# Altium PCB Telemetry_board_pcb.PcbDoc (part 2 of 3)
Units mil, origin at the board's own origin, x right, y up, seen from the top; angles counter-clockwise.
Board outline 3620 x 3014 mil, 2 copper layers (Top Layer, Bottom Layer); 34 components, 32 nets, 214 pads, 35 vias.
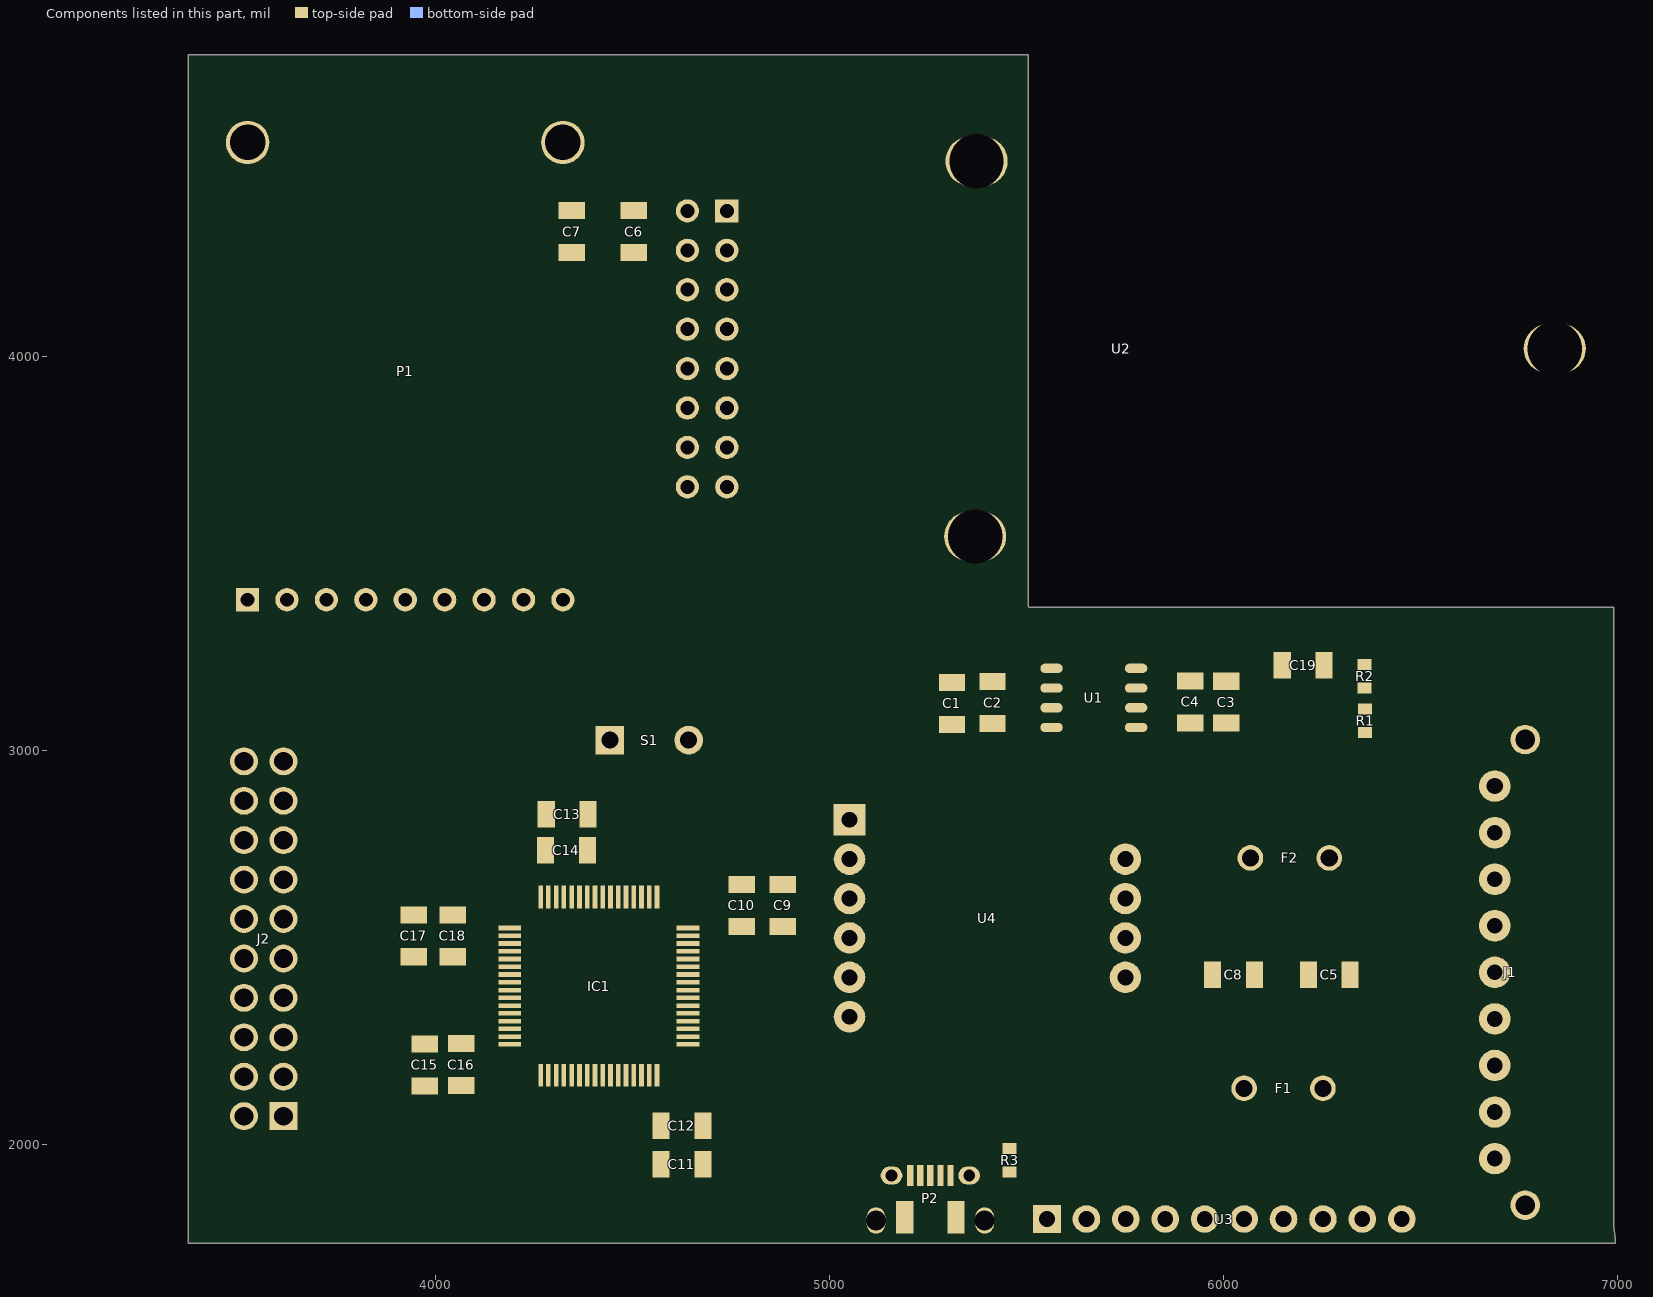
[diagram p2: the components of this part, seen from the top]

## Via types
v1: diameter 20, hole 7.87, Top Layer to Bottom Layer, 21 vias
v2: diameter 20, hole 8, Top Layer to Bottom Layer, 14 vias

## Nets (pads, with @x,y where several pads share a name; then routed paths per layer and width w, separated by ;. In a path a pad name is that pad's centre, name@x,y a point inside that pad or via, vN(x,y) a via of type N, cw(c..) or ccw(c..) an arc to the next point about the centre after c; other vN are vias at no path point) (continued)
copper on no net: (continued)
  Top Layer w1: 4445.84,4500.63 4520.84,4500.63 ; 4445.84,4501.63 4520.84,4501.63 ; 4445.84,4502.63 4520.84,4502.63 ; 4445.84,4503.63 4520.84,4503.63 ; 4445.84,4504.63 4520.84,4504.63 ; 4445.84,4505.63 4520.84,4505.63 ; 4445.84,4506.63 4520.84,4506.63 ; 4445.84,4507.63 4520.84,4507.63 ; 4445.84,4508.63 4520.84,4508.63 ; 4445.84,4509.63 4520.84,4509.63 ; 4445.84,4510.63 4520.84,4510.63 ; 4445.84,4511.63 4520.84,4511.63 ; 4445.84,4512.63 4520.84,4512.63 ; 4445.84,4513.63 4520.84,4513.63 ; 4445.84,4514.63 4520.84,4514.63 ; 4445.84,4515.63 4520.84,4515.63 ; 4445.84,4516.63 4520.84,4516.63 ; 4445.84,4517.63 4520.84,4517.63 ; 4445.84,4518.63 4520.84,4518.63 ; 4445.84,4519.63 4520.84,4519.63 ; 4445.84,4520.63 4520.84,4520.63 ; 4445.84,4521.63 4520.84,4521.63 ; 4445.84,4522.63 4520.84,4522.63 ; 4445.84,4523.63 4520.84,4523.63 ; 4445.84,4524.63 4520.84,4524.63 ; 4445.84,4525.63 4520.84,4525.63 ; 4445.84,4526.63 4520.84,4526.63 ; 4445.84,4527.63 4520.84,4527.63 ; 4445.84,4528.63 4520.84,4528.63 ; 4445.84,4529.63 4520.84,4529.63 ; 4445.84,4530.63 4520.84,4530.63 ; 4445.84,4531.63 4520.84,4531.63 ; 4445.84,4532.63 4520.84,4532.63 ; 4445.84,4533.63 4520.84,4533.63 ; 4445.84,4534.63 4520.84,4534.63 ; 4445.84,4535.63 4520.84,4535.63 ; 4445.84,4536.63 4520.84,4536.63 ; 4445.84,4537.63 4520.84,4537.63 ; 4445.84,4538.63 4520.84,4538.63 ; 4445.84,4539.63 4520.84,4539.63 ; 4445.84,4540.63 4520.84,4540.63 ; 4445.84,4541.63 4520.84,4541.63 ; 4445.84,4542.63 4520.84,4542.63 ; 4445.84,4543.63 4520.84,4543.63 ; 4445.84,4544.63 4520.84,4544.63 ; 4445.84,4545.63 4520.84,4545.63 ; 4445.84,4546.63 4520.84,4546.63 ; 4445.84,4547.63 4520.84,4547.63 ; 4445.84,4548.63 4520.84,4548.63 ; 4445.84,4549.63 4520.84,4549.63 ; 4445.84,4550.63 4520.84,4550.63 ; 4445.84,4551.63 4520.84,4551.63 ; 4445.84,4552.63 4520.84,4552.63 ; 4445.84,4553.63 4520.84,4553.63 ; 4445.84,4554.63 4520.84,4554.63 ; 4445.84,4555.63 4520.84,4555.63 ; 4445.84,4556.63 4520.84,4556.63 ; 4445.84,4578.63 4453.84,4578.63 ; 4445.84,4579.63 4452.84,4579.63 ; 4445.84,4580.63 4451.84,4580.63 ; 4445.84,4581.63 4451.84,4581.63 ; 4445.84,4582.63 4451.84,4582.63 ; 4445.84,4583.63 4451.84,4583.63 ; 4445.84,4584.63 4451.84,4584.63 ; 4445.84,4585.63 4451.84,4585.63 ; 4445.84,4586.63 4451.84,4586.63 ; 4445.84,4587.63 4451.84,4587.63 ; 4445.84,4588.63 4451.84,4588.63 ; 4445.84,4589.63 4451.84,4589.63 ; 4445.84,4590.63 4451.84,4590.63 ; 4445.84,4591.63 4451.84,4591.63 ; 4445.84,4592.63 4451.84,4592.63 ; 4445.84,4593.63 4451.84,4593.63 ; 4445.84,4594.63 4451.84,4594.63 ; 4445.84,4595.63 4451.84,4595.63 ; 4445.84,4596.63 4451.84,4596.63 ; 4445.84,4597.63 4451.84,4597.63 ; 4445.84,4598.63 4451.84,4598.63 ; 4445.84,4599.63 4451.84,4599.63 ; 4445.84,4600.63 4451.84,4600.63 ; 4445.84,4601.63 4451.84,4601.63 ; 4445.84,4602.63 4451.84,4602.63 ; 4445.84,4603.63 4451.84,4603.63 ; 4445.84,4604.63 4451.84,4604.63 ; 4445.84,4605.63 4451.84,4605.63 ; 4445.84,4606.63 4451.84,4606.63 ; 4445.84,4607.63 4451.84,4607.63 ; 4445.84,4608.63 4451.84,4608.63 ; 4445.84,4609.63 4451.84,4609.63 ; 4445.84,4610.63 4451.84,4610.63 ; 4445.84,4611.63 4451.84,4611.63 ; 4445.84,4612.63 4451.84,4612.63 ; 4445.84,4613.63 4451.84,4613.63 ; 4445.84,4614.63 4451.84,4614.63 ; 4445.84,4615.63 4451.84,4615.63 ; 4445.84,4616.63 4451.84,4616.63 ; 4445.84,4617.63 4451.84,4617.63 ; 4445.84,4618.63 4451.84,4618.63 ; 4445.84,4619.63 4451.84,4619.63 ; 4445.84,4620.63 4451.84,4620.63 ; 4445.84,4621.63 4451.84,4621.63 ; 4445.84,4622.63 4451.84,4622.63 ; 4445.84,4623.63 4451.84,4623.63 ; 4445.84,4624.63 4451.84,4624.63 ; 4445.84,4625.63 4451.84,4625.63 ; 4445.84,4626.63 4451.84,4626.63 ; 4445.84,4627.63 4451.84,4627.63 ; 4445.84,4628.63 4451.84,4628.63 ; 4445.84,4629.63 4451.84,4629.63 ; 4445.84,4630.63 4451.84,4630.63 ; 4445.84,4631.63 4451.84,4631.63 ; 4445.84,4632.63 4451.84,4632.63 ; 4445.84,4633.63 4452.84,4633.63 ; 4445.84,4634.63 4453.84,4634.63 ; 4445.84,4656.63 4453.84,4656.63 ; 4445.84,4657.63 4452.84,4657.63 ; 4445.84,4658.63 4451.84,4658.63 ; 4445.84,4659.63 4451.84,4659.63 ; 4445.84,4660.63 4451.84,4660.63 ; 4445.84,4661.63 4451.84,4661.63 ; 4445.84,4662.63 4451.84,4662.63 ; 4445.84,4663.63 4451.84,4663.63 ; 4445.84,4664.63 4451.84,4664.63 ; 4445.84,4665.63 4451.84,4665.63 ; 4445.84,4666.63 4451.84,4666.63 ; 4445.84,4667.63 4451.84,4667.63 ; 4445.84,4668.63 4451.84,4668.63 ; 4445.84,4669.63 4451.84,4669.63 ; 4445.84,4670.63 4451.84,4670.63 ; 4445.84,4671.63 4451.84,4671.63 ; 4445.84,4672.63 4451.84,4672.63 ; 4445.84,4673.63 4451.84,4673.63 ; 4445.84,4674.63 4451.84,4674.63 ; 4445.84,4675.63 4451.84,4675.63 ; 4445.84,4676.63 4451.84,4676.63 ; 4445.84,4677.63 4451.84,4677.63 ; 4445.84,4678.63 4451.84,4678.63 ; 4445.84,4679.63 4451.84,4679.63 ; 4445.84,4680.63 4451.84,4680.63 ; 4445.84,4681.63 4451.84,4681.63 ; 4445.84,4682.63 4451.84,4682.63 ; 4445.84,4683.63 4451.84,4683.63 ; 4445.84,4684.63 4451.84,4684.63 ; 4445.84,4685.63 4451.84,4685.63 ; 4445.84,4686.63 4451.84,4686.63 ; 4445.84,4687.63 4451.84,4687.63 ; 4445.84,4688.63 4451.84,4688.63 ; 4445.84,4689.63 4451.84,4689.63 ; 4445.84,4690.63 4451.84,4690.63 ; 4445.84,4691.63 4451.84,4691.63 ; 4445.84,4692.63 4451.84,4692.63 ; 4445.84,4693.63 4451.84,4693.63 ; 4445.84,4694.63 4451.84,4694.63 ; 4445.84,4695.63 4451.84,4695.63 ; 4445.84,4696.63 4451.84,4696.63 ; 4445.84,4697.63 4451.84,4697.63 ; 4445.84,4698.63 4451.84,4698.63 ; 4445.84,4699.63 4451.84,4699.63 ; 4445.84,4700.63 4451.84,4700.63 ; 4445.84,4701.63 4451.84,4701.63 ; 4445.84,4702.63 4451.84,4702.63 ; 4445.84,4703.63 4451.84,4703.63 ; 4445.84,4704.63 4451.84,4704.63 ; 4445.84,4705.63 4451.84,4705.63 ; 4445.84,4706.63 4451.84,4706.63 ; 4445.84,4707.63 4451.84,4707.63 ; 4445.84,4708.63 4451.84,4708.63 ; 4445.84,4709.63 4451.84,4709.63 ; 4445.84,4710.63 4451.84,4710.63 ; 4445.84,4711.63 4452.84,4711.63 ; 4445.84,4712.63 4453.84,4712.63 ; 4446.84,4499.63 4519.84,4499.63 ; 4446.84,4557.63 4519.84,4557.63 ; 4446.84,4559.63 4447.84,4559.63 ; 4446.84,4577.63 4454.84,4577.63 ; 4446.84,4635.63 4454.84,4635.63 ; 4446.84,4637.63 4447.84,4637.63 ; 4446.84,4655.63 4454.84,4655.63 ; 4446.84,4713.63 4454.84,4713.63 ; 4446.84,4715.63 4447.84,4715.63 ; 4447.84,4498.63 4518.84,4498.63 ; 4447.84,4558.63 4518.84,4558.63 ; 4447.84,4576.63 4455.84,4576.63 ; 4447.84,4636.63 4455.84,4636.63 ; 4447.84,4638.63 4448.84,4638.63 ; 4447.84,4654.63 4455.84,4654.63 ; 4447.84,4714.63 4455.84,4714.63 ; 4447.84,4716.63 4448.84,4716.63 ; 4448.84,4497.63 4517.84,4497.63 ; 4448.84,4559.63 4517.84,4559.63 ; 4448.84,4561.63 4449.84,4561.63 ; 4448.84,4575.63 4517.84,4575.63 ; 4448.84,4637.63 4517.84,4637.63 ; 4448.84,4639.63 4449.84,4639.63 ; 4448.84,4653.63 4456.84,4653.63 ; 4448.84,4715.63 4517.84,4715.63 ; 4449.84,4496.63 4516.84,4496.63 ; 4449.84,4560.63 4516.84,4560.63 ; 4449.84,4562.63 4450.84,4562.63 ; 4449.84,4574.63 4516.84,4574.63 ; 4449.84,4638.63 4516.84,4638.63 ; 4449.84,4640.63 4450.84,4640.63 ; 4449.84,4652.63 4516.84,4652.63 ; 4449.84,4716.63 4516.84,4716.63 ; 4449.84,4718.63 4450.84,4718.63 ; 4450.84,4495.63 4515.84,4495.63 ; 4450.84,4561.63 4515.84,4561.63 ; 4450.84,4563.63 4451.84,4563.63 ; 4450.84,4573.63 4515.84,4573.63 ; 4450.84,4639.63 4515.84,4639.63 ; 4450.84,4651.63 4515.84,4651.63 ; 4450.84,4717.63 4515.84,4717.63 ; 4450.84,4719.63 4451.84,4719.63 ; 4451.84,4494.63 4514.84,4494.63 ; 4451.84,4562.63 4514.84,4562.63 ; 4451.84,4572.63 4514.84,4572.63 ; 4451.84,4640.63 4514.84,4640.63 ; 4451.84,4650.63 4514.84,4650.63 ; 4451.84,4718.63 4514.84,4718.63 ; 4452.84,4493.63 4513.84,4493.63 ; 4452.84,4563.63 4513.84,4563.63 ; 4452.84,4571.63 4513.84,4571.63 ; 4452.84,4641.63 4513.84,4641.63 ; 4452.84,4649.63 4513.84,4649.63 ; 4452.84,4719.63 4513.84,4719.63 ; 4453.84,4492.63 4512.84,4492.63 ; 4453.84,4564.63 4512.84,4564.63 ; 4453.84,4570.63 4512.84,4570.63 ; 4453.84,4642.63 4512.84,4642.63 ; 4453.84,4648.63 4512.84,4648.63 ; 4453.84,4720.63 4512.84,4720.63 ; 4508.84,4653.63 4517.84,4653.63 ; 4510.84,4576.63 4518.84,4576.63 ; 4510.84,4636.63 4518.84,4636.63 ; 4510.84,4654.63 4518.84,4654.63 ; 4510.84,4714.63 4518.84,4714.63 ; 4511.84,4577.63 4519.84,4577.63 ; 4511.84,4635.63 4519.84,4635.63 ; 4511.84,4655.63 4519.84,4655.63 ; 4511.84,4713.63 4519.84,4713.63 ; 4512.84,4578.63 4520.84,4578.63 ; 4512.84,4634.63 4520.84,4634.63 ; 4512.84,4656.63 4520.84,4656.63 ; 4512.84,4712.63 4520.84,4712.63 ; 4513.84,4579.63 4520.84,4579.63 ; 4513.84,4633.63 4520.84,4633.63 ; 4513.84,4657.63 4520.84,4657.63 ; 4513.84,4711.63 4520.84,4711.63 ; 4514.84,4563.63 4515.84,4563.63 ; 4514.84,4580.63 4520.84,4580.63 ; 4514.84,4581.63 4520.84,4581.63 ; 4514.84,4582.63 4520.84,4582.63 ; 4514.84,4583.63 4520.84,4583.63 ; 4514.84,4584.63 4520.84,4584.63 ; 4514.84,4585.63 4520.84,4585.63 ; 4514.84,4586.63 4520.84,4586.63 ; 4514.84,4587.63 4520.84,4587.63 ; 4514.84,4588.63 4520.84,4588.63 ; 4514.84,4589.63 4520.84,4589.63 ; 4514.84,4590.63 4520.84,4590.63 ; 4514.84,4592.63 4520.84,4592.63 ; 4514.84,4593.63 4520.84,4593.63 ; 4514.84,4594.63 4520.84,4594.63 ; 4514.84,4595.63 4520.84,4595.63 ; 4514.84,4596.63 4520.84,4596.63 ; 4514.84,4597.63 4520.84,4597.63 ; 4514.84,4598.63 4520.84,4598.63 ; 4514.84,4599.63 4520.84,4599.63 ; 4514.84,4600.63 4520.84,4600.63 ; 4514.84,4601.63 4520.84,4601.63 ; 4514.84,4602.63 4520.84,4602.63 ; 4514.84,4603.63 4520.84,4603.63 ; 4514.84,4604.63 4520.84,4604.63 ; 4514.84,4605.63 4520.84,4605.63 ; 4514.84,4606.63 4520.84,4606.63 ; 4514.84,4607.63 4520.84,4607.63 ; 4514.84,4608.63 4520.84,4608.63 ; 4514.84,4609.63 4520.84,4609.63 ; 4514.84,4610.63 4520.84,4610.63 ; 4514.84,4611.63 4520.84,4611.63 ; 4514.84,4612.63 4520.84,4612.63 ; 4514.84,4613.63 4520.84,4613.63 ; 4514.84,4614.63 4520.84,4614.63 ; 4514.84,4615.63 4520.84,4615.63 ; 4514.84,4616.63 4520.84,4616.63 ; 4514.84,4617.63 4520.84,4617.63 ; 4514.84,4618.63 4520.84,4618.63 ; 4514.84,4619.63 4520.84,4619.63 ; 4514.84,4620.63 4520.84,4620.63 ; 4514.84,4621.63 4520.84,4621.63 ; 4514.84,4622.63 4520.84,4622.63 ; 4514.84,4623.63 4520.84,4623.63 ; 4514.84,4624.63 4520.84,4624.63 ; 4514.84,4625.63 4520.84,4625.63 ; 4514.84,4626.63 4520.84,4626.63 ; 4514.84,4627.63 4520.84,4627.63 ; 4514.84,4628.63 4520.84,4628.63 ; 4514.84,4629.63 4520.84,4629.63 ; 4514.84,4630.63 4520.84,4630.63 ; 4514.84,4631.63 4520.84,4631.63 ; 4514.84,4632.63 4520.84,4632.63 ; 4514.84,4641.63 4515.84,4641.63 ; 4514.84,4658.63 4520.84,4658.63 ; 4514.84,4659.63 4520.84,4659.63 ; 4514.84,4660.63 4520.84,4660.63 ; 4514.84,4661.63 4520.84,4661.63 ; 4514.84,4662.63 4520.84,4662.63 ; 4514.84,4663.63 4520.84,4663.63 ; 4514.84,4664.63 4520.84,4664.63 ; 4514.84,4665.63 4520.84,4665.63 ; 4514.84,4666.63 4520.84,4666.63 ; 4514.84,4667.63 4520.84,4667.63 ; 4514.84,4668.63 4520.84,4668.63 ; 4514.84,4669.63 4520.84,4669.63 ; 4514.84,4670.63 4520.84,4670.63 ; 4514.84,4671.63 4520.84,4671.63 ; 4514.84,4672.63 4520.84,4672.63 ; 4514.84,4673.63 4520.84,4673.63 ; 4514.84,4674.63 4520.84,4674.63 ; 4514.84,4675.63 4520.84,4675.63 ; 4514.84,4676.63 4520.84,4676.63 ; 4514.84,4677.63 4520.84,4677.63 ; 4514.84,4678.63 4520.84,4678.63 ; 4514.84,4679.63 4520.84,4679.63 ; 4514.84,4680.63 4520.84,4680.63 ; 4514.84,4681.63 4520.84,4681.63 ; 4514.84,4682.63 4520.84,4682.63 ; 4514.84,4683.63 4520.84,4683.63 ; 4514.84,4684.63 4520.84,4684.63 ; 4514.84,4685.63 4520.84,4685.63 ; 4514.84,4686.63 4520.84,4686.63 ; 4514.84,4687.63 4520.84,4687.63 ; 4514.84,4688.63 4520.84,4688.63 ; 4514.84,4689.63 4520.84,4689.63 ; 4514.84,4690.63 4520.84,4690.63 ; 4514.84,4691.63 4520.84,4691.63 ; 4514.84,4692.63 4520.84,4692.63 ; 4514.84,4693.63 4520.84,4693.63 ; 4514.84,4694.63 4520.84,4694.63 ; 4514.84,4695.63 4520.84,4695.63 ; 4514.84,4696.63 4520.84,4696.63 ; 4514.84,4697.63 4520.84,4697.63 ; 4514.84,4698.63 4520.84,4698.63 ; 4514.84,4699.63 4520.84,4699.63 ; 4514.84,4700.63 4520.84,4700.63 ; 4514.84,4701.63 4520.84,4701.63 ; 4514.84,4702.63 4520.84,4702.63 ; 4514.84,4703.63 4520.84,4703.63 ; 4514.84,4704.63 4520.84,4704.63 ; 4514.84,4705.63 4520.84,4705.63 ; 4514.84,4706.63 4520.84,4706.63 ; 4514.84,4707.63 4520.84,4707.63 ; 4514.84,4708.63 4520.84,4708.63 ; 4514.84,4709.63 4520.84,4709.63 ; 4514.84,4710.63 4520.84,4710.63 ; 4514.84,4719.63 4515.84,4719.63 ; 4515.84,4562.63 4516.84,4562.63 ; 4515.84,4591.63 4520.84,4591.63 ; 4515.84,4640.63 4516.84,4640.63 ; 4515.84,4718.63 4516.84,4718.63 ; 4516.84,4561.63 4517.84,4561.63 ; 4516.84,4639.63 4517.84,4639.63 ; 4516.84,4717.63 4517.84,4717.63 ; 4517.84,4560.63 4518.84,4560.63 ; 4517.84,4638.63 4518.84,4638.63 ; 4517.84,4716.63 4518.84,4716.63 ; 4518.84,4559.63 4519.84,4559.63 ; 4518.84,4637.63 4519.84,4637.63 ; 4518.84,4715.63 4519.84,4715.63 ; 4526.84,4500.63 4601.84,4500.63 ; 4526.84,4501.63 4601.84,4501.63 ; 4526.84,4502.63 4601.84,4502.63 ; 4526.84,4503.63 4601.84,4503.63 ; 4526.84,4504.63 4601.84,4504.63 ; 4526.84,4505.63 4601.84,4505.63 ; 4526.84,4506.63 4601.84,4506.63 ; 4526.84,4507.63 4601.84,4507.63 ; 4526.84,4508.63 4601.84,4508.63 ; 4526.84,4509.63 4601.84,4509.63 ; 4526.84,4510.63 4601.84,4510.63 ; 4526.84,4511.63 4601.84,4511.63 ; 4526.84,4512.63 4601.84,4512.63 ; 4526.84,4513.63 4601.84,4513.63 ; 4526.84,4514.63 4601.84,4514.63 ; 4526.84,4515.63 4601.84,4515.63 ; 4526.84,4516.63 4601.84,4516.63 ; 4526.84,4517.63 4601.84,4517.63 ; 4526.84,4518.63 4601.84,4518.63 ; 4526.84,4519.63 4601.84,4519.63 ; 4526.84,4520.63 4601.84,4520.63 ; 4526.84,4521.63 4601.84,4521.63 ; 4526.84,4522.63 4601.84,4522.63 ; 4526.84,4523.63 4601.84,4523.63 ; 4526.84,4524.63 4601.84,4524.63 ; 4526.84,4525.63 4601.84,4525.63 ; 4526.84,4526.63 4601.84,4526.63 ; 4526.84,4527.63 4601.84,4527.63 ; 4526.84,4528.63 4601.84,4528.63 ; 4526.84,4529.63 4601.84,4529.63 ; 4526.84,4530.63 4601.84,4530.63 ; 4526.84,4531.63 4601.84,4531.63 ; 4526.84,4532.63 4601.84,4532.63 ; 4526.84,4533.63 4601.84,4533.63 ; 4526.84,4534.63 4601.84,4534.63 ; 4526.84,4535.63 4601.84,4535.63 ; 4526.84,4536.63 4601.84,4536.63 ; 4526.84,4537.63 4601.84,4537.63 ; 4526.84,4538.63 4601.84,4538.63 ; 4526.84,4539.63 4601.84,4539.63 ; 4526.84,4540.63 4601.84,4540.63 ; 4526.84,4541.63 4601.84,4541.63 ; 4526.84,4542.63 4601.84,4542.63 ; 4526.84,4543.63 4601.84,4543.63 ; 4526.84,4544.63 4601.84,4544.63 ; 4526.84,4545.63 4601.84,4545.63 ; 4526.84,4546.63 4601.84,4546.63 ; 4526.84,4547.63 4601.84,4547.63 ; 4526.84,4548.63 4601.84,4548.63 ; 4526.84,4549.63 4601.84,4549.63 ; 4526.84,4550.63 4601.84,4550.63 ; 4526.84,4551.63 4601.84,4551.63 ; 4526.84,4552.63 4601.84,4552.63 ; 4526.84,4553.63 4601.84,4553.63 ; 4526.84,4554.63 4601.84,4554.63 ; 4526.84,4555.63 4601.84,4555.63 ; 4526.84,4656.63 4534.84,4656.63 ; 4526.84,4657.63 4533.84,4657.63 ; 4526.84,4658.63 4532.84,4658.63 ; 4526.84,4659.63 4532.84,4659.63 ; 4526.84,4660.63 4532.84,4660.63 ; 4526.84,4661.63 4532.84,4661.63 ; 4526.84,4662.63 4532.84,4662.63 ; 4526.84,4663.63 4532.84,4663.63 ; 4526.84,4664.63 4532.84,4664.63 ; 4526.84,4665.63 4532.84,4665.63 ; 4526.84,4666.63 4532.84,4666.63 ; 4526.84,4667.63 4532.84,4667.63 ; 4526.84,4668.63 4532.84,4668.63 ; 4526.84,4669.63 4532.84,4669.63 ; 4526.84,4670.63 4532.84,4670.63 ; 4526.84,4671.63 4532.84,4671.63 ; 4526.84,4672.63 4532.84,4672.63 ; 4526.84,4673.63 4532.84,4673.63 ; 4526.84,4674.63 4532.84,4674.63 ; 4526.84,4675.63 4532.84,4675.63 ; 4526.84,4676.63 4532.84,4676.63 ; 4526.84,4677.63 4532.84,4677.63 ; 4526.84,4678.63 4532.84,4678.63 ; 4526.84,4679.63 4532.84,4679.63 ; 4526.84,4680.63 4532.84,4680.63 ; 4526.84,4681.63 4532.84,4681.63 ; 4526.84,4682.63 4532.84,4682.63 ; 4526.84,4683.63 4532.84,4683.63 ; 4526.84,4684.63 4532.84,4684.63 ; 4526.84,4685.63 4532.84,4685.63 ; 4526.84,4686.63 4532.84,4686.63 ; 4526.84,4687.63 4532.84,4687.63 ; 4526.84,4688.63 4532.84,4688.63 ; 4526.84,4689.63 4532.84,4689.63 ; 4526.84,4690.63 4532.84,4690.63 ; 4526.84,4691.63 4532.84,4691.63 ; 4526.84,4692.63 4532.84,4692.63 ; 4526.84,4693.63 4532.84,4693.63 ; 4526.84,4694.63 4532.84,4694.63 ; 4526.84,4695.63 4532.84,4695.63 ; 4526.84,4696.63 4532.84,4696.63 ; 4526.84,4697.63 4532.84,4697.63 ; 4526.84,4698.63 4532.84,4698.63 ; 4526.84,4699.63 4532.84,4699.63 ; 4526.84,4700.63 4532.84,4700.63 ; 4526.84,4701.63 4532.84,4701.63 ; 4526.84,4702.63 4532.84,4702.63 ; 4526.84,4703.63 4532.84,4703.63 ; 4526.84,4704.63 4532.84,4704.63 ; 4526.84,4705.63 4532.84,4705.63 ; 4526.84,4706.63 4532.84,4706.63 ; 4526.84,4707.63 4532.84,4707.63 ; 4526.84,4708.63 4532.84,4708.63 ; 4526.84,4709.63 4532.84,4709.63 ; 4526.84,4710.63 4532.84,4710.63 ; 4526.84,4711.63 4533.84,4711.63 ; 4527.84,4497.63 4528.84,4497.63 ; 4527.84,4499.63 4601.84,4499.63 ; 4527.84,4556.63 4601.84,4556.63 ; 4527.84,4557.63 4600.84,4557.63 ; 4527.84,4559.63 4528.84,4559.63 ; 4527.84,4577.63 4533.84,4577.63 ; 4527.84,4578.63 4534.84,4578.63 ; 4527.84,4579.63 4535.84,4579.63 ; 4527.84,4580.63 4536.84,4580.63 ; 4527.84,4581.63 4537.84,4581.63 ; 4527.84,4582.63 4538.84,4582.63 ; 4527.84,4583.63 4539.84,4583.63 ; 4527.84,4584.63 4540.84,4584.63 ; 4527.84,4585.63 4541.84,4585.63 ; 4527.84,4586.63 4533.84,4586.63 ; 4527.84,4587.63 4533.84,4587.63 ; 4527.84,4588.63 4533.84,4588.63 ; 4527.84,4589.63 4533.84,4589.63 ; 4527.84,4590.63 4533.84,4590.63 ; 4527.84,4591.63 4533.84,4591.63 ; 4527.84,4592.63 4533.84,4592.63 ; 4527.84,4593.63 4533.84,4593.63 ; 4527.84,4594.63 4533.84,4594.63 ; 4527.84,4595.63 4533.84,4595.63 ; 4527.84,4596.63 4533.84,4596.63 ; 4527.84,4597.63 4533.84,4597.63 ; 4527.84,4598.63 4533.84,4598.63 ; 4527.84,4599.63 4533.84,4599.63 ; 4527.84,4600.63 4533.84,4600.63 ; 4527.84,4601.63 4533.84,4601.63 ; 4527.84,4602.63 4533.84,4602.63 ; 4527.84,4603.63 4533.84,4603.63 ; 4527.84,4604.63 4533.84,4604.63 ; 4527.84,4605.63 4533.84,4605.63 ; 4527.84,4606.63 4533.84,4606.63 ; 4527.84,4607.63 4533.84,4607.63 ; 4527.84,4608.63 4533.84,4608.63 ; 4527.84,4609.63 4533.84,4609.63 ; 4527.84,4610.63 4533.84,4610.63 ; 4527.84,4611.63 4533.84,4611.63 ; 4527.84,4612.63 4533.84,4612.63 ; 4527.84,4613.63 4533.84,4613.63 ; 4527.84,4614.63 4533.84,4614.63 ; 4527.84,4615.63 4533.84,4615.63 ; 4527.84,4616.63 4533.84,4616.63 ; 4527.84,4617.63 4533.84,4617.63 ; 4527.84,4618.63 4533.84,4618.63 ; 4527.84,4619.63 4533.84,4619.63 ; 4527.84,4620.63 4533.84,4620.63 ; 4527.84,4621.63 4533.84,4621.63 ; 4527.84,4622.63 4533.84,4622.63 ; 4527.84,4623.63 4533.84,4623.63 ; 4527.84,4624.63 4533.84,4624.63 ; 4527.84,4625.63 4533.84,4625.63 ; 4527.84,4626.63 4533.84,4626.63 ; 4527.84,4627.63 4533.84,4627.63 ; 4527.84,4628.63 4533.84,4628.63 ; 4527.84,4629.63 4533.84,4629.63 ; 4527.84,4630.63 4533.84,4630.63 ; 4527.84,4631.63 4533.84,4631.63 ; 4527.84,4632.63 4533.84,4632.63 ; 4527.84,4633.63 4534.84,4633.63 ; 4527.84,4634.63 4535.84,4634.63 ; 4527.84,4653.63 4528.84,4653.63 ; 4527.84,4655.63 4535.84,4655.63 ; 4527.84,4712.63 4534.84,4712.63 ; 4527.84,4713.63 4535.84,4713.63 ; 4527.84,4715.63 4528.84,4715.63 ; 4528.84,4498.63 4600.84,4498.63 ; 4528.84,4558.63 4599.84,4558.63 ; 4528.84,4576.63 4532.84,4576.63 ; 4528.84,4635.63 4536.84,4635.63 ; 4528.84,4652.63 4529.84,4652.63 ; 4528.84,4654.63 4536.84,4654.63 ; 4528.84,4714.63 4536.84,4714.63 ; 4528.84,4716.63 4529.84,4716.63 ; 4529.84,4495.63 4530.84,4495.63 ; 4529.84,4497.63 4599.84,4497.63 ; 4529.84,4559.63 4598.84,4559.63 ; 4529.84,4561.63 4530.84,4561.63 ; 4529.84,4575.63 4531.84,4575.63 ; 4529.84,4636.63 4537.84,4636.63 ; 4529.84,4653.63 4537.84,4653.63 ; 4529.84,4715.63 4598.84,4715.63 ; 4529.84,4717.63 4530.84,4717.63 ; 4530.84,4496.63 4598.84,4496.63 ; 4530.84,4560.63 4597.84,4560.63 ; 4530.84,4562.63 4531.84,4562.63 ; 4530.84,4637.63 4593.84,4637.63 ; 4530.84,4650.63 4531.84,4650.63 ; 4530.84,4652.63 4598.84,4652.63 ; 4530.84,4716.63 4597.84,4716.63 ; 4530.84,4718.63 4531.84,4718.63 ; 4531.84,4493.63 4532.84,4493.63 ; 4531.84,4495.63 4597.84,4495.63 ; 4531.84,4561.63 4596.84,4561.63 ; 4531.84,4563.63 4532.84,4563.63 ; 4531.84,4638.63 4594.84,4638.63 ; 4531.84,4651.63 4597.84,4651.63 ; 4531.84,4717.63 4596.84,4717.63 ; 4531.84,4719.63 4532.84,4719.63 ; 4532.84,4494.63 4596.84,4494.63 ; 4532.84,4562.63 4595.84,4562.63 ; 4532.84,4570.63 4533.84,4570.63 ; 4532.84,4572.63 4596.84,4572.63 ; 4532.84,4573.63 4597.84,4573.63 ; 4532.84,4639.63 4595.84,4639.63 ; 4532.84,4650.63 4596.84,4650.63 ; 4532.84,4718.63 4595.84,4718.63 ; 4533.84,4493.63 4595.84,4493.63 ; 4533.84,4563.63 4594.84,4563.63 ; 4533.84,4571.63 4595.84,4571.63 ; 4533.84,4574.63 4598.84,4574.63 ; 4533.84,4640.63 4595.84,4640.63 ; 4533.84,4649.63 4594.84,4649.63 ; 4533.84,4719.63 4594.84,4719.63 ; 4534.84,4492.63 4594.84,4492.63 ; 4534.84,4564.63 4593.84,4564.63 ; 4534.84,4570.63 4594.84,4570.63 ; 4534.84,4575.63 4599.84,4575.63 ; 4534.84,4586.63 4542.84,4586.63 ; 4534.84,4641.63 4594.84,4641.63 ; 4534.84,4648.63 4594.84,4648.63 ; 4534.84,4720.63 4593.84,4720.63 ; 4535.84,4576.63 4600.84,4576.63 ; 4535.84,4587.63 4543.84,4587.63 ; 4535.84,4642.63 4593.84,4642.63 ; 4536.84,4577.63 4601.84,4577.63 ; 4536.84,4588.63 4544.84,4588.63 ; 4537.84,4578.63 4601.84,4578.63 ; 4537.84,4589.63 4545.84,4589.63 ; 4538.84,4579.63 4602.84,4579.63 ; 4538.84,4590.63 4546.84,4590.63 ; 4539.84,4580.63 4602.84,4580.63 ; 4539.84,4591.63 4547.84,4591.63 ; 4540.84,4581.63 4602.84,4581.63 ; 4540.84,4592.63 4548.84,4592.63 ; 4541.84,4582.63 4602.84,4582.63 ; 4541.84,4593.63 4549.84,4593.63 ; 4542.84,4583.63 4602.84,4583.63 ; 4542.84,4594.63 4550.84,4594.63 ; 4543.84,4584.63 4602.84,4584.63 ; 4543.84,4595.63 4551.84,4595.63 ; 4544.84,4585.63 4602.84,4585.63 ; 4544.84,4596.63 4552.84,4596.63 ; 4545.84,4586.63 4602.84,4586.63 ; 4545.84,4597.63 4553.84,4597.63 ; 4546.84,4587.63 4602.84,4587.63 ; 4546.84,4598.63 4554.84,4598.63 ; 4547.84,4588.63 4602.84,4588.63 ; 4547.84,4599.63 4555.84,4599.63 ; 4548.84,4589.63 4602.84,4589.63 ; 4548.84,4600.63 4556.84,4600.63 ; 4549.84,4590.63 4602.84,4590.63 ; 4549.84,4601.63 4557.84,4601.63 ; 4550.84,4591.63 4602.84,4591.63 ; 4550.84,4602.63 4558.84,4602.63 ; 4551.84,4592.63 4602.84,4592.63 ; 4551.84,4594.63 4552.84,4594.63 ; 4551.84,4603.63 4559.84,4603.63 ; 4552.84,4593.63 4602.84,4593.63 ; 4552.84,4595.63 4553.84,4595.63 ; 4552.84,4604.63 4560.84,4604.63 ; 4553.84,4594.63 4602.84,4594.63 ; 4553.84,4596.63 4554.84,4596.63 ; 4553.84,4605.63 4561.84,4605.63 ; 4554.84,4595.63 4602.84,4595.63 ; 4554.84,4597.63 4555.84,4597.63 ; 4554.84,4606.63 4562.84,4606.63 ; 4555.84,4596.63 4602.84,4596.63 ; 4555.84,4598.63 4556.84,4598.63 ; 4555.84,4607.63 4563.84,4607.63 ; 4556.84,4597.63 4602.84,4597.63 ; 4556.84,4599.63 4557.84,4599.63 ; 4556.84,4608.63 4564.84,4608.63 ; 4557.84,4598.63 4602.84,4598.63 ; 4557.84,4600.63 4558.84,4600.63 ; 4557.84,4609.63 4565.84,4609.63 ; 4558.84,4599.63 4602.84,4599.63 ; 4558.84,4601.63 4559.84,4601.63 ; 4558.84,4610.63 4566.84,4610.63 ; 4559.84,4600.63 4602.84,4600.63 ; 4559.84,4602.63 4560.84,4602.63 ; 4559.84,4611.63 4567.84,4611.63 ; 4560.84,4601.63 4602.84,4601.63 ; 4560.84,4603.63 4561.84,4603.63 ; 4560.84,4612.63 4568.84,4612.63 ; 4561.84,4602.63 4602.84,4602.63 ; 4561.84,4604.63 4562.84,4604.63 ; 4561.84,4613.63 4569.84,4613.63 ; 4561.84,4653.63 4562.84,4653.63 ; 4562.84,4603.63 4602.84,4603.63 ; 4562.84,4605.63 4563.84,4605.63 ; 4562.84,4614.63 4570.84,4614.63 ; 4563.84,4604.63 4602.84,4604.63 ; 4563.84,4606.63 4564.84,4606.63 ; 4563.84,4615.63 4571.84,4615.63 ; 4564.84,4605.63 4602.84,4605.63 ; 4564.84,4607.63 4565.84,4607.63 ; 4564.84,4616.63 4572.84,4616.63 ; 4565.84,4606.63 4602.84,4606.63 ; 4565.84,4608.63 4566.84,4608.63 ; 4565.84,4617.63 4573.84,4617.63 ; 4566.84,4607.63 4602.84,4607.63 ; 4566.84,4609.63 4567.84,4609.63 ; 4566.84,4618.63 4574.84,4618.63 ; 4567.84,4608.63 4602.84,4608.63 ; 4567.84,4610.63 4568.84,4610.63 ; 4567.84,4619.63 4575.84,4619.63 ; 4568.84,4609.63 4602.84,4609.63 ; 4568.84,4611.63 4569.84,4611.63 ; 4568.84,4620.63 4576.84,4620.63 ; 4569.84,4610.63 4602.84,4610.63 ; 4569.84,4612.63 4570.84,4612.63 ; 4569.84,4621.63 4577.84,4621.63 ; 4570.84,4611.63 4602.84,4611.63 ; 4570.84,4613.63 4571.84,4613.63 ; 4570.84,4622.63 4578.84,4622.63 ; 4571.84,4612.63 4602.84,4612.63 ; 4571.84,4614.63 4572.84,4614.63 ; 4571.84,4623.63 4579.84,4623.63 ; 4572.84,4613.63 4602.84,4613.63 ; 4572.84,4615.63 4573.84,4615.63 ; 4572.84,4624.63 4580.84,4624.63 ; 4573.84,4614.63 4602.84,4614.63 ; 4573.84,4616.63 4574.84,4616.63 ; 4573.84,4625.63 4581.84,4625.63 ; 4574.84,4615.63 4602.84,4615.63 ; 4574.84,4617.63 4575.84,4617.63 ; 4574.84,4626.63 4582.84,4626.63 ; 4575.84,4616.63 4602.84,4616.63 ; 4575.84,4618.63 4576.84,4618.63 ; 4575.84,4627.63 4583.84,4627.63 ; 4576.84,4617.63 4602.84,4617.63 ; 4576.84,4619.63 4577.84,4619.63 ; 4576.84,4628.63 4584.84,4628.63 ; 4577.84,4618.63 4602.84,4618.63 ; 4577.84,4620.63 4578.84,4620.63 ; 4577.84,4629.63 4585.84,4629.63 ; 4578.84,4619.63 4602.84,4619.63 ; 4578.84,4621.63 4579.84,4621.63 ; 4578.84,4630.63 4586.84,4630.63 ; 4579.84,4620.63 4602.84,4620.63 ; 4579.84,4622.63 4580.84,4622.63 ; 4579.84,4631.63 4587.84,4631.63 ; 4580.84,4621.63 4602.84,4621.63 ; 4580.84,4623.63 4581.84,4623.63 ; 4580.84,4632.63 4588.84,4632.63 ; 4581.84,4622.63 4602.84,4622.63 ; 4581.84,4624.63 4582.84,4624.63 ; 4581.84,4633.63 4589.84,4633.63 ; 4582.84,4623.63 4602.84,4623.63 ; 4582.84,4625.63 4583.84,4625.63 ; 4582.84,4634.63 4590.84,4634.63 ; 4583.84,4624.63 4602.84,4624.63 ; 4583.84,4626.63 4584.84,4626.63 ; 4583.84,4635.63 4591.84,4635.63 ; 4584.84,4625.63 4602.84,4625.63 ; 4584.84,4627.63 4585.84,4627.63 ; 4584.84,4636.63 4592.84,4636.63 ; 4585.84,4626.63 4602.84,4626.63 ; 4585.84,4628.63 4586.84,4628.63 ; 4586.84,4627.63 4602.84,4627.63 ; 4586.84,4629.63 4587.84,4629.63 ; 4587.84,4628.63 4602.84,4628.63 ; 4587.84,4630.63 4588.84,4630.63 ; 4588.84,4629.63 4602.84,4629.63 ; 4588.84,4631.63 4589.84,4631.63 ; 4589.84,4630.63 4602.84,4630.63 ; 4589.84,4632.63 4590.84,4632.63 ; 4590.84,4631.63 4602.84,4631.63 ; 4590.84,4633.63 4591.84,4633.63 ; 4591.84,4632.63 4602.84,4632.63 ; 4591.84,4634.63 4592.84,4634.63 ; 4591.84,4653.63 4599.84,4653.63 ; 4591.84,4714.63 4599.84,4714.63 ; 4592.84,4633.63 4602.84,4633.63 ; 4592.84,4635.63 4593.84,4635.63 ; 4592.84,4654.63 4600.84,4654.63 ; 4592.84,4713.63 4600.84,4713.63 ; 4593.84,4634.63 4601.84,4634.63 ; 4593.84,4636.63 4594.84,4636.63 ; 4593.84,4655.63 4601.84,4655.63 ; 4593.84,4712.63 4601.84,4712.63 ; 4594.84,4635.63 4600.84,4635.63 ; 4594.84,4637.63 4595.84,4637.63 ; 4594.84,4656.63 4601.84,4656.63 ; 4594.84,4711.63 4601.84,4711.63 ; 4595.84,4636.63 4599.84,4636.63 ; 4595.84,4657.63 4601.84,4657.63 ; 4595.84,4658.63 4601.84,4658.63 ; 4595.84,4659.63 4601.84,4659.63 ; 4595.84,4660.63 4601.84,4660.63 ; 4595.84,4661.63 4601.84,4661.63 ; 4595.84,4662.63 4601.84,4662.63 ; 4595.84,4663.63 4601.84,4663.63 ; 4595.84,4664.63 4601.84,4664.63 ; 4595.84,4665.63 4601.84,4665.63 ; 4595.84,4666.63 4601.84,4666.63 ; 4595.84,4667.63 4601.84,4667.63 ; 4595.84,4668.63 4601.84,4668.63 ; 4595.84,4669.63 4601.84,4669.63 ; 4595.84,4670.63 4601.84,4670.63 ; 4595.84,4671.63 4601.84,4671.63 ; 4595.84,4672.63 4601.84,4672.63 ; 4595.84,4673.63 4601.84,4673.63 ; 4595.84,4674.63 4601.84,4674.63 ; 4595.84,4675.63 4601.84,4675.63 ; 4595.84,4676.63 4601.84,4676.63 ; 4595.84,4677.63 4601.84,4677.63 ; 4595.84,4678.63 4601.84,4678.63 ; 4595.84,4679.63 4601.84,4679.63 ; 4595.84,4680.63 4601.84,4680.63 ; 4595.84,4681.63 4601.84,4681.63 ; 4595.84,4682.63 4601.84,4682.63 ; 4595.84,4683.63 4601.84,4683.63 ; 4595.84,4684.63 4601.84,4684.63 ; 4595.84,4685.63 4601.84,4685.63 ; 4595.84,4686.63 4601.84,4686.63 ; 4595.84,4687.63 4601.84,4687.63 ; 4595.84,4688.63 4601.84,4688.63 ; 4595.84,4689.63 4601.84,4689.63 ; 4595.84,4690.63 4601.84,4690.63 ; 4595.84,4691.63 4601.84,4691.63 ; 4595.84,4692.63 4601.84,4692.63 ; 4595.84,4693.63 4601.84,4693.63 ; 4595.84,4694.63 4601.84,4694.63 ; 4595.84,4695.63 4601.84,4695.63 ; 4595.84,4696.63 4601.84,4696.63 ; 4595.84,4697.63 4601.84,4697.63 ; 4595.84,4698.63 4601.84,4698.63 ; 4595.84,4699.63 4601.84,4699.63 ; 4595.84,4700.63 4601.84,4700.63 ; 4595.84,4701.63 4601.84,4701.63 ; 4595.84,4702.63 4601.84,4702.63 ; 4595.84,4703.63 4601.84,4703.63 ; 4595.84,4704.63 4601.84,4704.63 ; 4595.84,4705.63 4601.84,4705.63 ; 4595.84,4706.63 4601.84,4706.63 ; 4595.84,4707.63 4601.84,4707.63 ; 4595.84,4708.63 4601.84,4708.63 ; 4595.84,4709.63 4601.84,4709.63 ; 4595.84,4710.63 4601.84,4710.63 ; 4596.84,4571.63 4597.84,4571.63 ; 4596.84,4637.63 4598.84,4637.63 ; 4597.84,4572.63 4598.84,4572.63 ; 4598.84,4573.63 4599.84,4573.63 ; 4599.84,4574.63 4600.84,4574.63 ; 4600.84,4575.63 4601.84,4575.63 ; 4608.84,4497.63 4609.84,4497.63 ; 4608.84,4499.63 4682.84,4499.63 ; 4608.84,4500.63 4682.84,4500.63 ; 4608.84,4501.63 4683.84,4501.63 ; 4608.84,4502.63 4682.84,4502.63 ; 4608.84,4503.63 4682.84,4503.63 ; 4608.84,4504.63 4682.84,4504.63 ; 4608.84,4505.63 4682.84,4505.63 ; 4608.84,4506.63 4682.84,4506.63 ; 4608.84,4507.63 4682.84,4507.63 ; 4608.84,4508.63 4682.84,4508.63 ; 4608.84,4509.63 4682.84,4509.63 ; 4608.84,4510.63 4682.84,4510.63 ; 4608.84,4511.63 4682.84,4511.63 ; 4608.84,4512.63 4682.84,4512.63 ; 4608.84,4513.63 4682.84,4513.63 ; 4608.84,4514.63 4682.84,4514.63 ; 4608.84,4515.63 4682.84,4515.63 ; 4608.84,4516.63 4682.84,4516.63 ; 4608.84,4517.63 4682.84,4517.63 ; 4608.84,4518.63 4682.84,4518.63 ; 4608.84,4519.63 4682.84,4519.63 ; 4608.84,4520.63 4682.84,4520.63 ; 4608.84,4521.63 4682.84,4521.63 ; 4608.84,4522.63 4682.84,4522.63 ; 4608.84,4523.63 4682.84,4523.63 ; 4608.84,4524.63 4682.84,4524.63 ; 4608.84,4525.63 4682.84,4525.63 ; 4608.84,4526.63 4682.84,4526.63 ; 4608.84,4527.63 4682.84,4527.63 ; 4608.84,4528.63 4682.84,4528.63 ; 4608.84,4529.63 4682.84,4529.63 ; 4608.84,4530.63 4682.84,4530.63 ; 4608.84,4531.63 4682.84,4531.63 ; 4608.84,4532.63 4682.84,4532.63 ; 4608.84,4533.63 4682.84,4533.63 ; 4608.84,4534.63 4682.84,4534.63 ; 4608.84,4535.63 4682.84,4535.63 ; 4608.84,4536.63 4682.84,4536.63 ; 4608.84,4538.63 4682.84,4538.63 ; 4608.84,4539.63 4682.84,4539.63 ; 4608.84,4540.63 4682.84,4540.63 ; 4608.84,4541.63 4682.84,4541.63 ; 4608.84,4542.63 4682.84,4542.63 ; 4608.84,4543.63 4682.84,4543.63 ; 4608.84,4544.63 4682.84,4544.63 ; 4608.84,4545.63 4682.84,4545.63 ; 4608.84,4546.63 4682.84,4546.63 ; 4608.84,4547.63 4682.84,4547.63 ; 4608.84,4548.63 4682.84,4548.63 ; 4608.84,4549.63 4682.84,4549.63 ; 4608.84,4550.63 4682.84,4550.63 ; 4608.84,4551.63 4682.84,4551.63 ; 4608.84,4552.63 4682.84,4552.63 ; 4608.84,4553.63 4682.84,4553.63 ; 4608.84,4554.63 4682.84,4554.63 ; 4608.84,4555.63 4683.84,4555.63 ; 4608.84,4556.63 4682.84,4556.63 ; 4608.84,4575.63 4609.84,4575.63 ; 4608.84,4577.63 4682.84,4577.63 ; 4608.84,4578.63 4682.84,4578.63 ; 4608.84,4579.63 4683.84,4579.63 ; 4608.84,4580.63 4682.84,4580.63 ; 4608.84,4581.63 4682.84,4581.63 ; 4608.84,4582.63 4682.84,4582.63 ; 4608.84,4583.63 4682.84,4583.63 ; 4608.84,4584.63 4682.84,4584.63 ; 4608.84,4585.63 4682.84,4585.63 ; 4608.84,4586.63 4682.84,4586.63 ; 4608.84,4587.63 4682.84,4587.63 ; 4608.84,4588.63 4682.84,4588.63 ; 4608.84,4589.63 4682.84,4589.63 ; 4608.84,4590.63 4682.84,4590.63 ; 4608.84,4591.63 4682.84,4591.63 ; 4608.84,4592.63 4682.84,4592.63 ; 4608.84,4593.63 4682.84,4593.63 ; 4608.84,4594.63 4682.84,4594.63 ; 4608.84,4595.63 4682.84,4595.63 ; 4608.84,4596.63 4682.84,4596.63 ; 4608.84,4597.63 4682.84,4597.63 ; 4608.84,4598.63 4682.84,4598.63 ; 4608.84,4599.63 4682.84,4599.63 ; 4608.84,4600.63 4682.84,4600.63 ; 4608.84,4601.63 4682.84,4601.63 ; 4608.84,4602.63 4682.84,4602.63 ; 4608.84,4603.63 4682.84,4603.63 ; 4608.84,4604.63 4682.84,4604.63 ; 4608.84,4605.63 4682.84,4605.63 ; 4608.84,4606.63 4682.84,4606.63 ; 4608.84,4607.63 4682.84,4607.63 ; 4608.84,4608.63 4682.84,4608.63 ; 4608.84,4609.63 4682.84,4609.63 ; 4608.84,4610.63 4682.84,4610.63 ; 4608.84,4611.63 4682.84,4611.63 ; 4608.84,4612.63 4682.84,4612.63 ; 4608.84,4613.63 4682.84,4613.63 ; 4608.84,4614.63 4682.84,4614.63 ; 4608.84,4615.63 4682.84,4615.63 ; 4608.84,4616.63 4682.84,4616.63 ; 4608.84,4617.63 4682.84,4617.63 ; 4608.84,4618.63 4682.84,4618.63 ; 4608.84,4619.63 4682.84,4619.63 ; 4608.84,4620.63 4682.84,4620.63 ; 4608.84,4621.63 4682.84,4621.63 ; 4608.84,4622.63 4682.84,4622.63 ; 4608.84,4623.63 4682.84,4623.63 ; 4608.84,4624.63 4682.84,4624.63 ; 4608.84,4625.63 4682.84,4625.63 ; 4608.84,4626.63 4682.84,4626.63 ; 4608.84,4627.63 4682.84,4627.63 ; 4608.84,4628.63 4682.84,4628.63 ; 4608.84,4629.63 4682.84,4629.63 ; 4608.84,4630.63 4682.84,4630.63 ; 4608.84,4631.63 4682.84,4631.63 ; 4608.84,4632.63 4682.84,4632.63 ; 4608.84,4633.63 4683.84,4633.63 ; 4608.84,4634.63 4682.84,4634.63 ; 4608.84,4653.63 4609.84,4653.63 ; 4608.84,4655.63 4682.84,4655.63 ; 4608.84,4656.63 4682.84,4656.63 ; 4608.84,4657.63 4683.84,4657.63 ; 4608.84,4658.63 4682.84,4658.63 ; 4608.84,4659.63 4682.84,4659.63 ; 4608.84,4660.63 4682.84,4660.63 ; 4608.84,4661.63 4682.84,4661.63 ; 4608.84,4662.63 4682.84,4662.63 ; 4608.84,4663.63 4682.84,4663.63 ; 4608.84,4664.63 4682.84,4664.63 ; 4608.84,4665.63 4682.84,4665.63 ; 4608.84,4666.63 4682.84,4666.63 ; 4608.84,4667.63 4682.84,4667.63 ; 4608.84,4668.63 4682.84,4668.63 ; 4608.84,4669.63 4682.84,4669.63 ; 4608.84,4670.63 4682.84,4670.63 ; 4608.84,4671.63 4682.84,4671.63 ; 4608.84,4672.63 4682.84,4672.63 ; 4608.84,4673.63 4682.84,4673.63 ; 4608.84,4674.63 4682.84,4674.63 ; 4608.84,4675.63 4682.84,4675.63 ; 4608.84,4676.63 4682.84,4676.63 ; 4608.84,4677.63 4682.84,4677.63 ; 4608.84,4678.63 4682.84,4678.63 ; 4608.84,4679.63 4682.84,4679.63 ; 4608.84,4680.63 4682.84,4680.63 ; 4608.84,4681.63 4682.84,4681.63 ; 4608.84,4682.63 4682.84,4682.63 ; 4608.84,4683.63 4682.84,4683.63 ; 4608.84,4684.63 4682.84,4684.63 ; 4608.84,4685.63 4682.84,4685.63 ; 4608.84,4686.63 4682.84,4686.63 ; 4608.84,4687.63 4682.84,4687.63 ; 4608.84,4688.63 4682.84,4688.63 ; 4608.84,4689.63 4682.84,4689.63 ; 4608.84,4690.63 4682.84,4690.63 ; 4608.84,4691.63 4682.84,4691.63 ; 4608.84,4692.63 4682.84,4692.63 ; 4608.84,4693.63 4682.84,4693.63 ; 4608.84,4694.63 4682.84,4694.63 ; 4608.84,4695.63 4682.84,4695.63 ; 4608.84,4696.63 4682.84,4696.63 ; 4608.84,4697.63 4682.84,4697.63 ; 4608.84,4698.63 4682.84,4698.63 ; 4608.84,4699.63 4682.84,4699.63 ; 4608.84,4700.63 4682.84,4700.63 ; 4608.84,4701.63 4682.84,4701.63 ; 4608.84,4702.63 4682.84,4702.63 ; 4608.84,4703.63 4682.84,4703.63 ; 4608.84,4704.63 4682.84,4704.63 ; 4608.84,4705.63 4682.84,4705.63 ; 4608.84,4706.63 4682.84,4706.63 ; 4608.84,4707.63 4682.84,4707.63 ; 4608.84,4708.63 4682.84,4708.63 ; 4608.84,4709.63 4682.84,4709.63 ; 4608.84,4710.63 4682.84,4710.63 ; 4608.84,4711.63 4683.84,4711.63 ; 4608.84,4712.63 4682.84,4712.63 ; 4609.84,4496.63 4610.84,4496.63 ; 4609.84,4498.63 4681.84,4498.63 ; 4609.84,4557.63 4681.84,4557.63 ; 4609.84,4574.63 4610.84,4574.63 ; 4609.84,4576.63 4681.84,4576.63 ; 4609.84,4635.63 4681.84,4635.63 ; 4609.84,4652.63 4610.84,4652.63 ; 4609.84,4654.63 4681.84,4654.63 ; 4609.84,4713.63 4681.84,4713.63 ; 4610.84,4495.63 4611.84,4495.63 ; 4610.84,4497.63 4680.84,4497.63 ; 4610.84,4558.63 4680.84,4558.63 ; 4610.84,4573.63 4611.84,4573.63 ; 4610.84,4575.63 4680.84,4575.63 ; 4610.84,4636.63 4680.84,4636.63 ; 4610.84,4651.63 4611.84,4651.63 ; 4610.84,4653.63 4680.84,4653.63 ; 4610.84,4714.63 4680.84,4714.63 ; 4611.84,4494.63 4612.84,4494.63 ; 4611.84,4496.63 4679.84,4496.63 ; 4611.84,4559.63 4679.84,4559.63 ; 4611.84,4572.63 4612.84,4572.63 ; 4611.84,4574.63 4679.84,4574.63 ; 4611.84,4637.63 4679.84,4637.63 ; 4611.84,4650.63 4612.84,4650.63 ; 4611.84,4652.63 4679.84,4652.63 ; 4611.84,4715.63 4679.84,4715.63 ; 4612.84,4493.63 4613.84,4493.63 ; 4612.84,4495.63 4678.84,4495.63 ; 4612.84,4560.63 4678.84,4560.63 ; 4612.84,4571.63 4613.84,4571.63 ; 4612.84,4573.63 4678.84,4573.63 ; 4612.84,4638.63 4678.84,4638.63 ; 4612.84,4649.63 4613.84,4649.63 ; 4612.84,4651.63 4678.84,4651.63 ; 4612.84,4716.63 4678.84,4716.63 ; 4613.84,4494.63 4677.84,4494.63 ; 4613.84,4561.63 4677.84,4561.63 ; 4613.84,4572.63 4677.84,4572.63 ; 4613.84,4639.63 4677.84,4639.63 ; 4613.84,4648.63 4614.84,4648.63 ; 4613.84,4650.63 4677.84,4650.63 ; 4613.84,4717.63 4677.84,4717.63 ; 4614.84,4493.63 4676.84,4493.63 ; 4614.84,4562.63 4676.84,4562.63 ; 4614.84,4571.63 4676.84,4571.63 ; 4614.84,4640.63 4676.84,4640.63 ; 4614.84,4649.63 4676.84,4649.63 ; 4614.84,4718.63 4676.84,4718.63 ; 4615.84,4492.63 4675.84,4492.63 ; 4615.84,4563.63 4675.84,4563.63 ; 4615.84,4570.63 4675.84,4570.63 ; 4615.84,4641.63 4675.84,4641.63 ; 4615.84,4648.63 4675.84,4648.63 ; 4615.84,4719.63 4675.84,4719.63 ; 4616.84,4564.63 4674.84,4564.63 ; 4616.84,4642.63 4674.84,4642.63 ; 4616.84,4720.63 4674.84,4720.63 ; 4676.84,4648.63 4677.84,4648.63 ; 4677.84,4493.63 4678.84,4493.63 ; 4677.84,4571.63 4678.84,4571.63 ; 4677.84,4649.63 4678.84,4649.63 ; 4678.84,4494.63 4679.84,4494.63 ; 4678.84,4572.63 4679.84,4572.63 ; 4678.84,4650.63 4679.84,4650.63 ; 4679.84,4495.63 4680.84,4495.63 ; 4679.84,4573.63 4680.84,4573.63 ; 4679.84,4651.63 4680.84,4651.63 ; 4680.84,4496.63 4681.84,4496.63 ; 4680.84,4574.63 4681.84,4574.63 ; 4680.84,4652.63 4681.84,4652.63 ; 4681.84,4497.63 4682.84,4497.63 ; 4681.84,4575.63 4682.84,4575.63 ; 4681.84,4653.63 4682.84,4653.63 ; 4695.84,4570.63 4724.84,4570.63 ; 4695.84,4571.63 4724.84,4571.63 ; 4695.84,4572.63 4724.84,4572.63 ; 4695.84,4573.63 4723.84,4573.63 ; 4695.84,4574.63 4723.84,4574.63 ; 4695.84,4575.63 4723.84,4575.63 ; 4695.84,4576.63 4723.84,4576.63 ; 4695.84,4577.63 4723.84,4577.63 ; 4695.84,4578.63 4723.84,4578.63 ; 4695.84,4579.63 4723.84,4579.63 ; 4695.84,4580.63 4723.84,4580.63 ; 4695.84,4581.63 4723.84,4581.63 ; 4695.84,4582.63 4723.84,4582.63 ; 4695.84,4583.63 4723.84,4583.63 ; 4695.84,4584.63 4723.84,4584.63 ; 4695.84,4585.63 4723.84,4585.63 ; 4695.84,4586.63 4724.84,4586.63 ; 4695.84,4587.63 4724.84,4587.63 ; 4696.84,4564.63 4726.84,4564.63 ; 4696.84,4565.63 4725.84,4565.63 ; 4696.84,4566.63 4725.84,4566.63 ; 4696.84,4567.63 4725.84,4567.63 ; 4696.84,4568.63 4724.84,4568.63 ; 4696.84,4569.63 4724.84,4569.63 ; 4696.84,4588.63 4724.84,4588.63 ; 4696.84,4589.63 4724.84,4589.63 ; 4696.84,4590.63 4724.84,4590.63 ; 4696.84,4591.63 4725.84,4591.63 ; 4696.84,4592.63 4725.84,4592.63 ; 4697.84,4560.63 4728.84,4560.63 ; 4697.84,4561.63 4727.84,4561.63 ; 4697.84,4562.63 4727.84,4562.63 ; 4697.84,4563.63 4726.84,4563.63 ; 4697.84,4593.63 4725.84,4593.63 ; 4697.84,4594.63 4726.84,4594.63 ; 4697.84,4595.63 4726.84,4595.63 ; 4697.84,4596.63 4727.84,4596.63 ; 4698.84,4519.63 4727.84,4519.63 ; 4698.84,4520.63 4727.84,4520.63 ; 4698.84,4521.63 4727.84,4521.63 ; 4698.84,4522.63 4726.84,4522.63 ; 4698.84,4557.63 4730.84,4557.63 ; 4698.84,4558.63 4729.84,4558.63 ; 4698.84,4559.63 4728.84,4559.63 ; 4698.84,4597.63 4727.84,4597.63 ; 4698.84,4598.63 4728.84,4598.63 ; 4698.84,4599.63 4729.84,4599.63 ; 4698.84,4603.63 4699.84,4603.63 ; 4699.84,4515.63 4730.84,4515.63 ; 4699.84,4516.63 4729.84,4516.63 ; 4699.84,4517.63 4728.84,4517.63 ; 4699.84,4518.63 4728.84,4518.63 ; 4699.84,4523.63 4725.84,4523.63 ; 4699.84,4554.63 4734.84,4554.63 ; 4699.84,4555.63 4732.84,4555.63 ; 4699.84,4556.63 4731.84,4556.63 ; 4699.84,4600.63 4730.84,4600.63 ; 4699.84,4601.63 4731.84,4601.63 ; 4699.84,4602.63 4732.84,4602.63 ; 4699.84,4654.63 4708.84,4654.63 ; 4699.84,4655.63 4708.84,4655.63 ; 4699.84,4656.63 4708.84,4656.63 ; 4699.84,4657.63 4708.84,4657.63 ; 4699.84,4658.63 4707.84,4658.63 ; 4700.84,4513.63 4732.84,4513.63 ; 4700.84,4514.63 4731.84,4514.63 ; 4700.84,4552.63 4738.84,4552.63 ; 4700.84,4553.63 4735.84,4553.63 ; 4700.84,4603.63 4733.84,4603.63 ; 4700.84,4604.63 4735.84,4604.63 ; 4700.84,4651.63 4709.84,4651.63 ; 4700.84,4652.63 4709.84,4652.63 ; 4700.84,4653.63 4708.84,4653.63 ; 4701.84,4511.63 4737.84,4511.63 ; 4701.84,4512.63 4734.84,4512.63 ; 4701.84,4550.63 4793.84,4550.63 ; 4701.84,4551.63 4793.84,4551.63 ; 4701.84,4605.63 4737.84,4605.63 ; 4701.84,4606.63 4742.84,4606.63 ; 4701.84,4648.63 4712.84,4648.63 ; 4701.84,4649.63 4711.84,4649.63 ; 4701.84,4650.63 4710.84,4650.63 ; 4701.84,4679.63 4711.84,4679.63 ; 4701.84,4680.63 4710.84,4680.63 ; 4701.84,4681.63 4710.84,4681.63 ; 4701.84,4682.63 4710.84,4682.63 ; 4701.84,4683.63 4710.84,4683.63 ; 4701.84,4684.63 4710.84,4684.63 ; 4701.84,4685.63 4710.84,4685.63 ; 4701.84,4686.63 4710.84,4686.63 ; 4701.84,4687.63 4710.84,4687.63 ; 4702.84,4509.63 4786.84,4509.63 ; 4702.84,4510.63 4742.84,4510.63 ; 4702.84,4548.63 4793.84,4548.63 ; 4702.84,4549.63 4793.84,4549.63 ; 4702.84,4607.63 4793.84,4607.63 ; 4702.84,4647.63 4713.84,4647.63 ; 4702.84,4677.63 4714.84,4677.63 ; 4702.84,4678.63 4712.84,4678.63 ; 4702.84,4688.63 4711.84,4688.63 ; 4702.84,4689.63 4711.84,4689.63 ; 4702.84,4690.63 4712.84,4690.63 ; 4703.84,4508.63 4786.84,4508.63 ; 4703.84,4547.63 4793.84,4547.63 ; 4703.84,4608.63 4793.84,4608.63 ; 4703.84,4609.63 4793.84,4609.63 ; 4703.84,4645.63 4718.84,4645.63 ; 4703.84,4646.63 4715.84,4646.63 ; 4703.84,4675.63 4719.84,4675.63 ; 4703.84,4676.63 4716.84,4676.63 ; 4703.84,4691.63 4714.84,4691.63 ; 4704.84,4506.63 4784.84,4506.63 ; 4704.84,4507.63 4785.84,4507.63 ; 4704.84,4546.63 4793.84,4546.63 ; 4704.84,4610.63 4793.84,4610.63 ; 4704.84,4644.63 4744.84,4644.63 ; 4704.84,4674.63 4722.84,4674.63 ; 4704.84,4692.63 4716.84,4692.63 ; 4704.84,4693.63 4722.84,4693.63 ; 4705.84,4503.63 4706.84,4503.63 ; 4705.84,4505.63 4783.84,4505.63 ; 4705.84,4542.63 4706.84,4542.63 ; 4705.84,4544.63 4793.84,4544.63 ; 4705.84,4545.63 4793.84,4545.63 ; 4705.84,4611.63 4793.84,4611.63 ; 4705.84,4612.63 4793.84,4612.63 ; 4705.84,4614.63 4706.84,4614.63 ; 4705.84,4643.63 4743.84,4643.63 ; 4705.84,4673.63 4727.84,4673.63 ; 4705.84,4694.63 4741.84,4694.63 ; 4706.84,4502.63 4707.84,4502.63 ; 4706.84,4504.63 4782.84,4504.63 ; 4706.84,4543.63 4793.84,4543.63 ; 4706.84,4613.63 4793.84,4613.63 ; 4706.84,4642.63 4742.84,4642.63 ; 4706.84,4672.63 4732.84,4672.63 ; 4706.84,4695.63 4740.84,4695.63 ; 4707.84,4503.63 4781.84,4503.63 ; 4707.84,4542.63 4765.84,4542.63 ; 4707.84,4614.63 4765.84,4614.63 ; 4707.84,4671.63 4736.84,4671.63 ; 4708.84,4502.63 4780.84,4502.63 ; 4708.84,4541.63 4764.84,4541.63 ; 4708.84,4615.63 4765.84,4615.63 ; 4708.84,4641.63 4741.84,4641.63 ; 4708.84,4696.63 4739.84,4696.63 ; 4709.84,4501.63 4779.84,4501.63 ; 4709.84,4538.63 4710.84,4538.63 ; 4709.84,4540.63 4763.84,4540.63 ; 4709.84,4616.63 4764.84,4616.63 ; 4709.84,4670.63 4738.84,4670.63 ; 4709.84,4697.63 4738.84,4697.63 ; 4710.84,4539.63 4762.84,4539.63 ; 4710.84,4617.63 4763.84,4617.63 ; 4710.84,4619.63 4711.84,4619.63 ; 4710.84,4640.63 4739.84,4640.63 ; 4711.84,4500.63 4777.84,4500.63 ; 4711.84,4538.63 4761.84,4538.63 ; 4711.84,4618.63 4762.84,4618.63 ; 4711.84,4650.63 4712.84,4650.63 ; 4711.84,4669.63 4740.84,4669.63 ; 4711.84,4681.63 4712.84,4681.63 ; 4711.84,4687.63 4712.84,4687.63 ; 4711.84,4698.63 4736.84,4698.63 ; 4712.84,4499.63 4776.84,4499.63 ; 4712.84,4619.63 4761.84,4619.63 ; 4712.84,4639.63 4737.84,4639.63 ; 4712.84,4649.63 4713.84,4649.63 ; 4712.84,4688.63 4713.84,4688.63 ; 4713.84,4537.63 4760.84,4537.63 ; 4713.84,4689.63 4714.84,4689.63 ; 4714.84,4498.63 4774.84,4498.63 ; 4714.84,4536.63 4759.84,4536.63 ; 4714.84,4620.63 4760.84,4620.63 ; 4714.84,4638.63 4734.84,4638.63 ; 4714.84,4668.63 4742.84,4668.63 ; 4714.84,4678.63 4715.84,4678.63 ; 4714.84,4699.63 4734.84,4699.63 ; 4715.84,4621.63 4759.84,4621.63 ; 4716.84,4495.63 4717.84,4495.63 ; 4716.84,4497.63 4772.84,4497.63 ; 4716.84,4535.63 4757.84,4535.63 ; 4717.84,4496.63 4770.84,4496.63 ; 4717.84,4622.63 4758.84,4622.63 ; 4717.84,4667.63 4743.84,4667.63 ; 4718.84,4534.63 4755.84,4534.63 ; 4719.84,4623.63 4756.84,4623.63 ; 4719.84,4700.63 4729.84,4700.63 ; 4720.84,4495.63 4768.84,4495.63 ; 4720.84,4533.63 4753.84,4533.63 ; 4720.84,4637.63 4728.84,4637.63 ; 4721.84,4624.63 4754.84,4624.63 ; 4722.84,4494.63 4765.84,4494.63 ; 4722.84,4666.63 4744.84,4666.63 ; 4723.84,4532.63 4750.84,4532.63 ; 4723.84,4625.63 4752.84,4625.63 ; 4724.84,4693.63 4742.84,4693.63 ; 4726.84,4493.63 4762.84,4493.63 ; 4726.84,4531.63 4747.84,4531.63 ; 4726.84,4626.63 4748.84,4626.63 ; 4726.84,4665.63 4745.84,4665.63 ; 4728.84,4561.63 4729.84,4561.63 ; 4729.84,4529.63 4730.84,4529.63 ; 4729.84,4598.63 4730.84,4598.63 ; 4730.84,4492.63 4757.84,4492.63 ; 4730.84,4516.63 4731.84,4516.63 ; 4730.84,4558.63 4731.84,4558.63 ; 4730.84,4599.63 4731.84,4599.63 ; 4730.84,4664.63 4746.84,4664.63 ; 4730.84,4692.63 4743.84,4692.63 ; 4731.84,4515.63 4732.84,4515.63 ; 4731.84,4557.63 4732.84,4557.63 ; 4731.84,4600.63 4732.84,4600.63 ; 4731.84,4636.63 4732.84,4636.63 ; 4731.84,4645.63 4745.84,4645.63 ; 4731.84,4690.63 4732.84,4690.63 ; 4732.84,4601.63 4733.84,4601.63 ; 4732.84,4627.63 4743.84,4627.63 ; 4732.84,4691.63 4744.84,4691.63 ; 4733.84,4663.63 4747.84,4663.63 ; 4734.84,4646.63 4746.84,4646.63 ; 4734.84,4690.63 4744.84,4690.63 ; 4735.84,4530.63 4740.84,4530.63 ; 4735.84,4689.63 4745.84,4689.63 ; 4736.84,4647.63 4747.84,4647.63 ; 4736.84,4649.63 4737.84,4649.63 ; 4736.84,4660.63 4737.84,4660.63 ; 4736.84,4662.63 4747.84,4662.63 ; 4736.84,4682.63 4737.84,4682.63 ; 4736.84,4687.63 4746.84,4687.63 ; 4736.84,4688.63 4745.84,4688.63 ; 4737.84,4491.63 4748.84,4491.63 ; 4737.84,4648.63 4747.84,4648.63 ; 4737.84,4650.63 4738.84,4650.63 ; 4737.84,4659.63 4738.84,4659.63 ; 4737.84,4661.63 4748.84,4661.63 ; 4737.84,4685.63 4746.84,4685.63 ; 4737.84,4686.63 4746.84,4686.63 ; 4738.84,4649.63 4748.84,4649.63 ; 4738.84,4660.63 4748.84,4660.63 ; 4738.84,4681.63 4747.84,4681.63 ; 4738.84,4682.63 4747.84,4682.63 ; 4738.84,4683.63 4747.84,4683.63 ; 4738.84,4684.63 4746.84,4684.63 ; 4739.84,4650.63 4748.84,4650.63 ; 4739.84,4651.63 4748.84,4651.63 ; 4739.84,4659.63 4748.84,4659.63 ; 4740.84,4652.63 4749.84,4652.63 ; 4740.84,4653.63 4749.84,4653.63 ; 4740.84,4654.63 4749.84,4654.63 ; 4740.84,4655.63 4749.84,4655.63 ; 4740.84,4656.63 4749.84,4656.63 ; 4740.84,4657.63 4749.84,4657.63 ; 4740.84,4658.63 4749.84,4658.63 ; 4746.84,4606.63 4793.84,4606.63 ; 4749.84,4510.63 4787.84,4510.63 ; 4750.84,4552.63 4793.84,4552.63 ; 4752.84,4605.63 4793.84,4605.63 ; 4753.84,4553.63 4793.84,4553.63 ; 4753.84,4661.63 4762.84,4661.63 ; 4753.84,4662.63 4762.84,4662.63 ; 4753.84,4663.63 4762.84,4663.63 ; 4753.84,4664.63 4762.84,4664.63 ; 4753.84,4665.63 4762.84,4665.63 ; 4753.84,4666.63 4761.84,4666.63 ; 4753.84,4667.63 4761.84,4667.63 ; 4753.84,4668.63 4761.84,4668.63 ; 4753.84,4669.63 4761.84,4669.63 ; 4753.84,4670.63 4761.84,4670.63 ; 4753.84,4671.63 4761.84,4671.63 ; 4753.84,4672.63 4762.84,4672.63 ; 4753.84,4673.63 4762.84,4673.63 ; 4753.84,4674.63 4762.84,4674.63 ; 4753.84,4675.63 4762.84,4675.63 ; 4753.84,4676.63 4762.84,4676.63 ; 4754.84,4511.63 4788.84,4511.63 ; 4754.84,4604.63 4793.84,4604.63 ; 4754.84,4657.63 4763.84,4657.63 ; 4754.84,4658.63 4763.84,4658.63 ; 4754.84,4659.63 4763.84,4659.63 ; 4754.84,4660.63 4763.84,4660.63 ; 4754.84,4677.63 4762.84,4677.63 ; 4754.84,4678.63 4763.84,4678.63 ; 4754.84,4679.63 4763.84,4679.63 ; 4754.84,4680.63 4763.84,4680.63 ; 4755.84,4554.63 4793.84,4554.63 ; 4755.84,4602.63 4756.84,4602.63 ; 4755.84,4654.63 4765.84,4654.63 ; 4755.84,4655.63 4764.84,4655.63 ; 4755.84,4656.63 4764.84,4656.63 ; 4755.84,4681.63 4764.84,4681.63 ; 4755.84,4682.63 4764.84,4682.63 ; 4755.84,4683.63 4765.84,4683.63 ; 4756.84,4512.63 4788.84,4512.63 ; 4756.84,4603.63 4793.84,4603.63 ; 4756.84,4652.63 4766.84,4652.63 ; 4756.84,4653.63 4765.84,4653.63 ; 4756.84,4684.63 4765.84,4684.63 ; 4756.84,4685.63 4766.84,4685.63 ; 4757.84,4514.63 4758.84,4514.63 ; 4757.84,4555.63 4793.84,4555.63 ; 4757.84,4557.63 4758.84,4557.63 ; 4757.84,4650.63 4768.84,4650.63 ; 4757.84,4651.63 4767.84,4651.63 ; 4757.84,4686.63 4767.84,4686.63 ; 4757.84,4687.63 4768.84,4687.63 ; 4758.84,4513.63 4789.84,4513.63 ; 4758.84,4515.63 4759.84,4515.63 ; 4758.84,4556.63 4793.84,4556.63 ; 4758.84,4558.63 4759.84,4558.63 ; 4758.84,4602.63 4793.84,4602.63 ; 4758.84,4649.63 4769.84,4649.63 ; 4758.84,4688.63 4769.84,4688.63 ; 4759.84,4514.63 4789.84,4514.63 ; 4759.84,4516.63 4760.84,4516.63 ; 4759.84,4557.63 4793.84,4557.63 ; 4759.84,4559.63 4760.84,4559.63 ; 4759.84,4601.63 4793.84,4601.63 ; 4759.84,4648.63 4770.84,4648.63 ; 4759.84,4689.63 4770.84,4689.63 ; 4760.84,4515.63 4790.84,4515.63 ; 4760.84,4517.63 4761.84,4517.63 ; 4760.84,4558.63 4793.84,4558.63 ; 4760.84,4597.63 4761.84,4597.63 ; 4760.84,4600.63 4793.84,4600.63 ; 4760.84,4646.63 4773.84,4646.63 ; 4760.84,4647.63 4771.84,4647.63 ; 4760.84,4690.63 4771.84,4690.63 ; 4760.84,4691.63 4773.84,4691.63 ; 4761.84,4516.63 4790.84,4516.63 ; 4761.84,4559.63 4793.84,4559.63